# EAGLE board Power-in (EAGLE 3.55)

No outline drawn. Coordinates in mm, seen from the top.
Copper layers used: 

## Footprints (pad centres in the part's own frame; a part is rotated, then mirrored left to right if it is on the bottom)
BMOUT2 = drill 2.184 pad 4.5 round:  -0.5,2.809;  -0.5,-3.31;  -5,-0.31
BMOUT1 = drill 1.676 pad 5.08 round:  6.985,-6.35;  0,-6.35;  -6.985,-6.35

## Placement (x,y rotation side)
E$1  [-35SC]  0,0 0 top
JACK-PMS  [BMOUT2]  50.8,213.36 0 top
POWER-PM  PCBMOUT1  [BMOUT1]  121.92,213.36 0 top

## Library data of the parts
E$1 = BLATT
JACK-PMS POWER-PM = Power-in